# Altium PCB PCB.PcbDoc
Units mm, origin at the board's own origin, x right, y up, seen from the top; angles counter-clockwise.
Board outline 159.64 x 71.88 mm, 2 copper layers (Top Layer, Bottom Layer); 31 components, 22 nets, 102 pads, 39 vias.
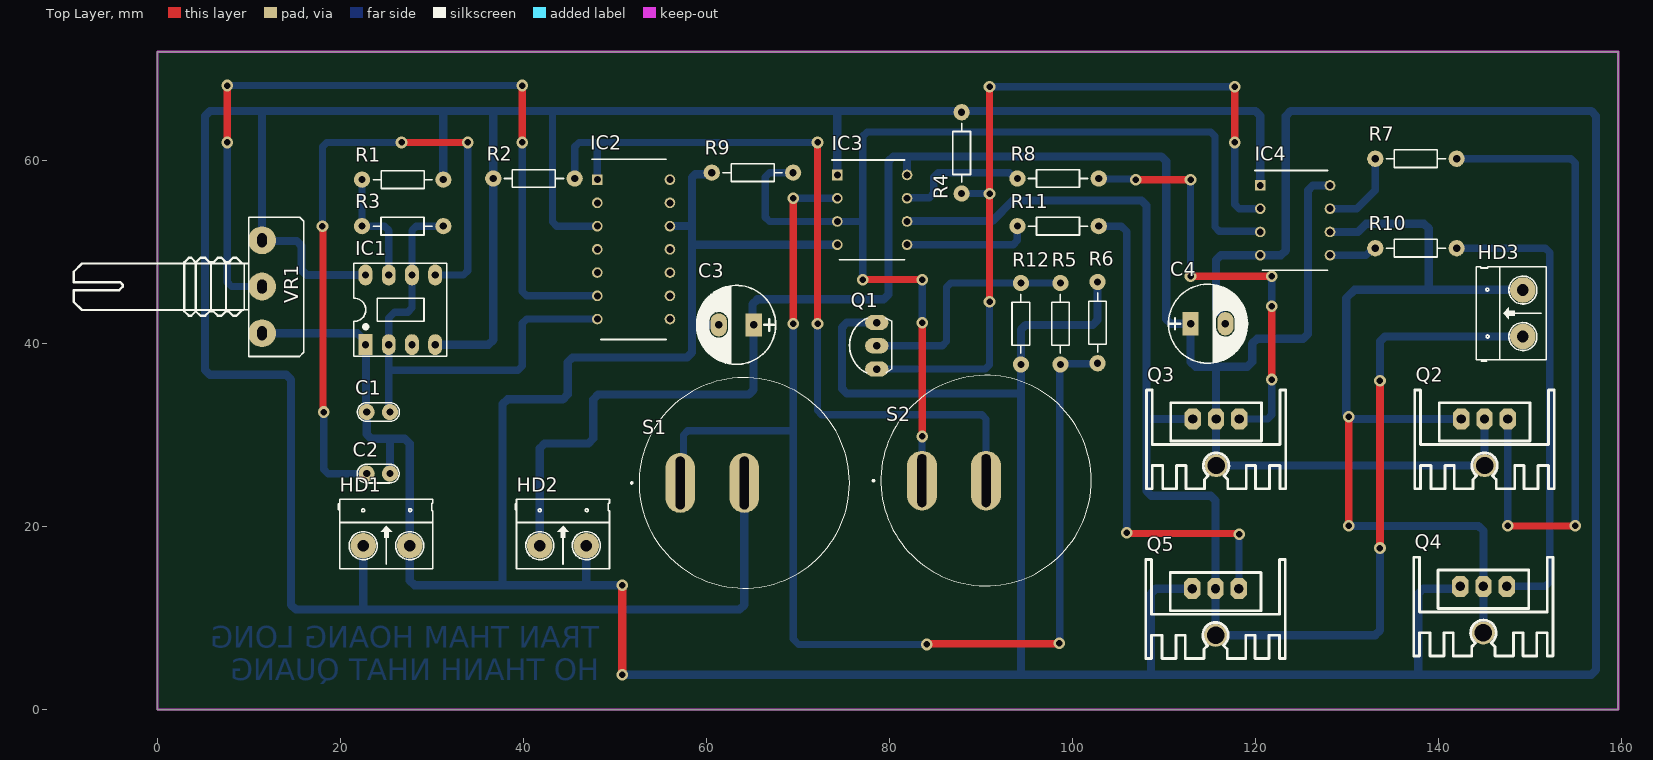
[diagram p0: Top Layer view]
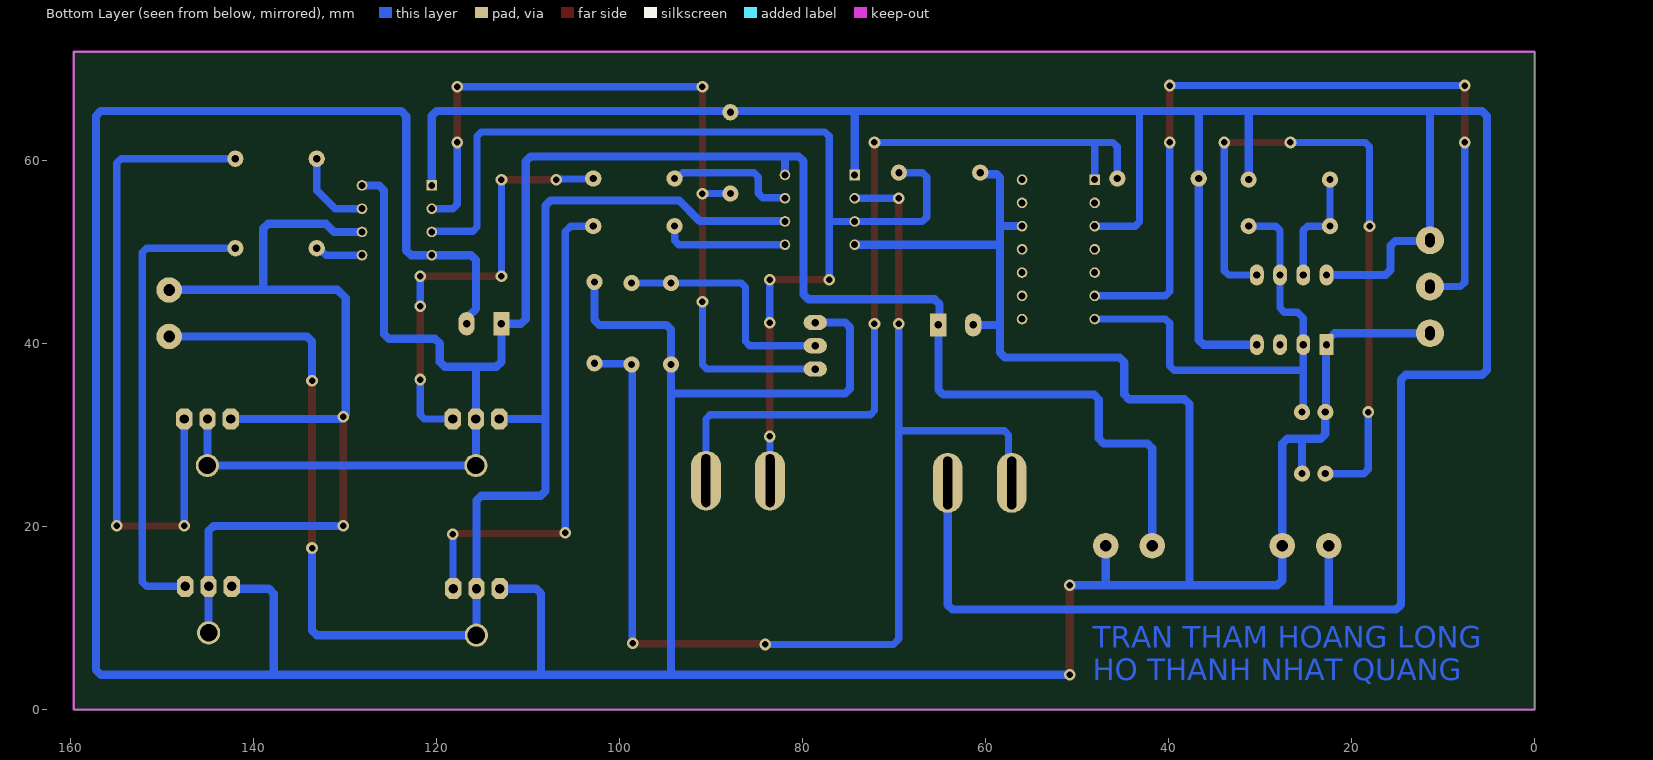
[diagram p1: Bottom Layer view, seen from below]
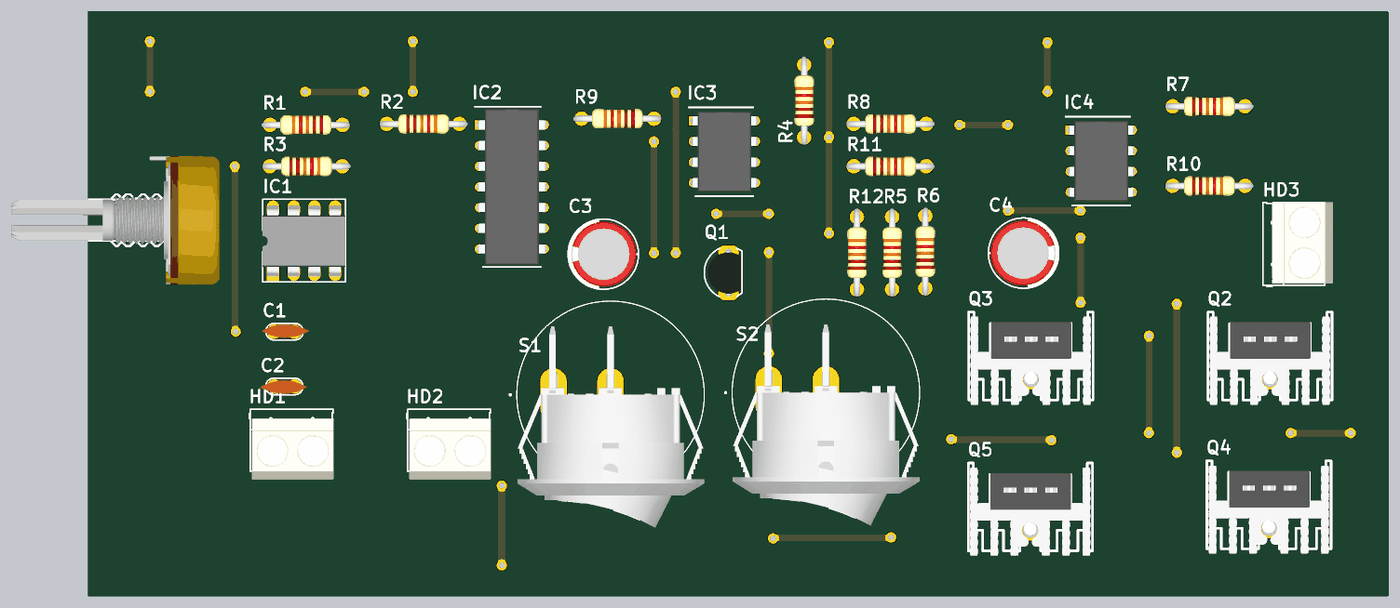
[diagram p2: 3D render of the assembled board from above, using the file's embedded part models]

## Layer stack, top to bottom
Top Solder: solder mask 0.0102, Solder Resist, Dk 3.5
Top Layer: signal copper 0.0356
Dielectric 1: dielectric 0.32, FR-4, Dk 4.8
Bottom Layer: signal copper 0.0356
Bottom Solder: solder mask 0.0102, Solder Resist, Dk 3.5

## Board outline
0,0 0,71.882 159.639,71.882 159.639,0

## Design rules (kind name [scope] priority, off if disabled: settings)
Clearance [All] p1: gap=0.7 ignorepadtopadclearanceinfootprint=FALSE
PlaneConnect [All] p1: planeconnectstyle=Direct reliefexpansion=0.508 reliefentries=4 reliefconductorwidth=0.254 reliefairgap=0.254
PolygonConnect [All] p1: connectstyle=Relief reliefconductorwidth=0.5 reliefentries=4 polygonreliefangle="90 Angle" airgapwidth=0.254
RoutingVias [All] p1: holewidth=0.762 width=2.032 viastyle="Through Hole" minholewidth=0.762 minwidth=2.032 maxholewidth=0.762 maxwidth=2.032
ShortCircuit [All] p1: allowed=TRUE
SolderMaskExpansion [All] p1: expansion=0.102 istentingtop=FALSE
UnRoutedNet [All] p1: checkbadconnections=TRUE
Width other [InNetClass('other')] p1: maxlimit=1.1 minlimit=0.5 preferedwidth=0.8
Width vcc [InNetClass('VCC')] p2: maxlimit=1.3 minlimit=0.8 preferedwidth=0.9
27 further rules are at their usual default settings.

## Classes and differential pairs
component class Schematic: C1 C2 C3 C4 HD1 HD2 HD3 IC1 IC2 IC3 IC4 Q1 Q4 Q5 R1 R2 R3 R4 R5 R6 R7 R8 R9 R10 R11 R12 S1 S2 VR1

## Components (designator, comment, footprint, x,y, rotation, side; value= is the part's Value field where it differs from the comment)
C1 "100nF" CN1 22.86,32.512 r0 top value=100pF
C2 "10nF" CN1 25.4,25.781 r180 top value=100pF
C3 "100uF/35V" CP1.5/3.4 65.151,42.037 r180 top value=100uF/35V/50V
C4 "100uF/35V" CP1.5/3.4 112.903,42.164 r0 top value=100uF/35V/50V
HD1 "Header 15V" HED2 22.479,17.907 r0 top value="Header 2"
HD2 "Header 12V" HED2 41.783,17.907 r0 top value="Header 2"
HD3 "Header Motor" HED2 149.225,40.767 r90 top value="Header 2"
IC1 "LM555" DIP8/W0.3 22.733,39.878 r0 top
IC2 "LM339AN" DIP794W56P254L1918H533Q14N 52.037,50.292 r0 top
IC3 "IR2104PBF" DIP762W56P254L988H533Q8N 78.105,54.61 r0 top
IC4 "IR2104PBF" DIP762W56P254L988H533Q8N 124.333,53.467 r0 top
Q1 "VN2222LL-G" QTO-92A 78.613,39.751 r90 top
Q2 "IRF520" QTO-220H3 147.574,31.75 r180 top
Q3 "IRF520" QTO-220H3 118.237,31.75 r180 top
Q4 "IRF520" QTO-220H3 147.447,13.462 r180 top
Q5 "IRF520" QTO-220H3 118.176,13.208 r180 top
R1 "10k" R1/4W 22.352,57.912 r0 top value="R1/4W - 1K"
R2 "10k" R1/4W 45.593,58.039 r180 top value="R1/4W - 1K"
R3 "10k" R1/4W 31.242,52.832 r180 top value="R1/4W - 1K"
R4 "1k" R1/4W 87.884,65.278 r270 top value="R1/4W - 1K"
R5 "1k" R1/4W 98.679,46.609 r270 top value="R1/4W - 1K"
R6 "10k" R1/4W 102.743,46.736 r270 top value="R1/4W - 1K"
R7 "1k" R1/4W 141.986,60.198 r180 top value="R1/4W - 1K"
R8 "1k" R1/4W 102.87,58.039 r180 top value="R1/4W - 1K"
R9 "10k" R1/4W 60.579,58.674 r0 top value="R1/4W - 1K"
R10 "1k" R1/4W 141.986,50.419 r180 top value="R1/4W - 1K"
R11 "1k" R1/4W 102.87,52.832 r180 top value="R1/4W - 1K"
R12 "1k" R1/4W 94.361,46.609 r270 top value="R1/4W - 1K"
S1 "RR511D1121" E-SWITCH_RR511D1121 64.135,24.765 r0 top
S2 "RR511D1121" E-SWITCH_RR511D1121 90.551,25.019 r0 top
VR1 "10K" VOL_1 11.43,51.283 r270 top value="VR 10K"

## Footprints (in the part's own frame and the unit in brackets; to place one, negate y for a bottom-side part, rotate by r counter-clockwise, add the part's x,y. Pads: shape width x height; smd on the part's side, far side on the other; paste and mask are expansions set on the pad)
CN1 [mil]
  round 70 hole 31: 1(0,0) 2(100,0)
  silkscreen extent -40,-40 141,40, body extent -60,-30 170,37, height 265
CP1.5/3.4 [mil] "Tu hoa 220->470uF,16V, 470uF/16V,25V"
  rect 70x100 hole 32: 1(0,0)
  oval 70x100 hole 32: 2(150,0)
  silkscreen extent -95,-170 245,170, body extent -85,-157 230,157, height 446
DIP8/W0.3 [mil] "8 PIN, W 300mil, Pin to pin 100mil"
  rect 60x90 hole 31: 1(0,0)
  oval 60x90 hole 31: 2(100,0) 3(200,0) 4(300,0) 5(300,300) 6(200,300) 7(100,300) 8(0,300)
  silkscreen extent -50,-50 350,350, body extent -50,-40 350,336, height 201
DIP762W56P254L988H533Q8N [mm]
  rect 1.158x1.158 hole 0.758: 1(-3.81,3.81)
  round 1.158 hole 0.758: 2(-3.81,1.27) 3(-3.81,-1.27) 4(-3.81,-3.81) 5(3.81,-3.81) 6(3.81,-1.27) 7(3.81,1.27) 8(3.81,3.81)
  silkscreen extent -4.39,-5.46 3.55,5.46, body extent -3.95,-4.94 3.95,4.94, height 5.33
DIP794W56P254L1918H533Q14N [mm]
  rect 1.16x1.16 hole 0.76: 1(-3.97,7.62)
  round 1.16 hole 0.76: 2(-3.97,5.08) 3(-3.97,2.54) 4(-3.97,0) 5(-3.97,-2.54) 6(-3.97,-5.08) 7(-3.97,-7.62) 8(3.97,-7.62) 9(3.97,-5.08) 10(3.97,-2.54) 11(3.97,0) 12(3.97,2.54) 13(3.97,5.08) 14(3.97,7.62)
  silkscreen extent -4.55,-9.84 3.56,9.84, body extent -4.11,-9.59 4.11,9.59, height 5.33
E-SWITCH_RR511D1121 [mm]
  oval 3.26x6.52 hole 0.98 slot 5.78 at 90 deg: 1(-7,0) 2(0,0)
  silkscreen extent -12.4,-11.5 11.5,11.5, body extent -11.5,-16.33 11.5,8.4, height 11.5
HED2 [mil] "Header 2, 2 pin, hight 300mil, Pin to Pin 200, Colour Green"
  round 110 hole 50: 1(0,0) 2(200,0)
  silkscreen extent -106,-100 300,200, body extent -92,-140 302,155, height 394
QTO-92A [mil] "TO-92"
  oval 66x100 hole 32: 1(100,0) 2(0,0) 3(-100,0)
  silkscreen extent -117,-65 119,118, body extent -110,-61 108,100, height 245
QTO-220H3 [mil] "TO-220 1-2-3"
  oct 70x90 hole 40: 1(0,0) 2(100,0) 3(200,0)
  round 100 hole 75: 2(100,200)
  silkscreen extent -200,-125 400,300, body extent -190,-102 392,323, height 984
R1/4W [mil] "R 1/4W, 2 Pin, 350mil"
  round 70 hole 31: 1(0,0) 2(350,0)
  silkscreen extent 48,-38 302,38, body extent -40,-47 386,47, height 111
VOL_1 [mil]
  round 120 hole 40 slot 60 at 0 deg: 1(0,0) 2(199,0) 3(400,0)
  silkscreen extent -99,-810 500,179, body extent -110,-818 510,188, height 839

## Part data
C1 C2: library part CN1, "Cap np  1pF - 472pF"
C3 C4: library part CP3, "Cap 100uF/35V - 470uF/16V", Description 1="1000uF/6,3V - 470uF/16V - 330uF - 25V", Description 2="220uF/35V - 100uF/50V - 63V - 4,7uF/200V", Description 3="22uF => 33uF100V - 3,3uF => 4,7uF/250V", Description 4="2,2uF =>3,3uF/350 - 2,2uF/400V - 1uF/450V"
HD1 HD2 HD3: library part Hed2, "Header 2 (Green)"
IC1: "Timer"
IC2: "Integrated Circuit", Manufacturer_Name=onsemi, Mouser Part Number=512-LM339AN, Arrow Part Number=LM339AN, Arrow Price/Stock=https://www.arrow.com/en/products/lm339an/on-semiconductor, Datasheet Link=https://www.onsemi.com/pub/Collateral/LM339A-D.pdf, Height=5.33mm, Manufacturer_Part_Number=LM339AN, Mouser Price/Stock=https://www.mouser.co.uk/ProductDetail/ON-Semiconductor-Fairchild/LM339AN?qs=r%252BnRUBmG8vwgzPexLRnjyQ%3D%3D
IC3 IC4: "Integrated Circuit", Manufacturer_Name=Infineon, Mouser Part Number=942-IR2104PBF, Arrow Part Number=IR2104PBF, Arrow Price/Stock=https://www.arrow.com/en/products/ir2104pbf/infineon-technologies-ag?region=nac, Datasheet Link=https://www.infineon.com/cms/en/product/power/gate-driver-ics/?, Height=5.33mm, Manufacturer_Part_Number=IR2104PBF, Mouser Price/Stock=https://www.mouser.co.uk/ProductDetail/Infineon-Technologies/IR2104PBF?qs=2r01AXMCG3MRbRuDhWcpKw%3D%3D
Q1: "MOSFET (N-Channel)", Manufacturer_Name=Microchip, Mouser Part Number=689-VN2222LL-G, Arrow Part Number=VN2222LL-G, Arrow Price/Stock=https://www.arrow.com/en/products/vn2222ll-g/microchip-technology?region=europe, Datasheet Link=http://www.microchip.com/mymicrochip/filehandler.aspx?ddocname=en571446, Height=5.334mm, Manufacturer_Part_Number=VN2222LL-G, Mouser Price/Stock=https://www.mouser.co.uk/ProductDetail/Microchip-Technology/VN2222LL-G?qs=H6g4Fy%252BsDGemwmUTAFka1Q%3D%3D
Q2 Q3 Q4 Q5: "MOSFET (N-Channel)", Manufacturer_Name=STMicroelectronics, Mouser Part Number=511-IRF520, Datasheet Link=https://eu.mouser.com/datasheet/2/389/stmicroelectronics_cd00000698-1204495.pdf, Height=4.6mm, Manufacturer_Part_Number=IRF520, Mouser Price/Stock=https://www.mouser.co.uk/ProductDetail/STMicroelectronics/IRF520?qs=%2FcnINApUglMqLk371v6AuA%3D%3D
R1 R2 R3 R4 R5 R6 R7 R8 R9 R10 R11 R12: library part R1/4W, "Resistor 1/4W"
S1 S2: "Rocker Switch, RR5 Series, SPST,OFF-ON,Blk Rocker,I/O Legend, 20A, 125VAC, QC", Package=None, Availability="In Stock", Check_prices=https://www.snapeda.com/parts/RR511D1121/E-Switch/view-part/?ref=eda, MF=E-Switch, MP=RR511D1121, Price=None, Purchase-URL=https://pricing.snapeda.com/search/part/RR511D1121/?ref=eda, SnapEDA_Link=https://www.snapeda.com/parts/RR511D1121/E-Switch/view-part/?ref=snap
VR1: library part "Var Resitor", "Var Resistor"

## Via types
v1: diameter 1.27, hole 0.711, Top Layer to Bottom Layer, 39 vias

## Nets (pads, with @x,y where several pads share a name; then routed paths per layer and width w, separated by ;. In a path a pad name is that pad's centre, name@x,y a point inside that pad or via, vN(x,y) a via of type N, cw(c..) or ccw(c..) an arc to the next point about the centre after c; other vN are vias at no path point)
+12V: C3.1 C4.1 HD2.1 IC3.8 IC4.8 Q2.2 Q3.2 | length 214.8
  Bottom Layer w0.9: HD2.1 41.783,28.556 42.31,29.083 47.098,29.083 47.625,29.61 47.625,33.89 48.152,34.417 64.624,34.417 65.151,34.944 C3.1 65.024,42.164 65.024,44.304 65.551,44.831 79.356,44.831 79.883,45.358 79.883,59.925 80.41,60.452 81.915,60.452 ; IC3.8 81.915,60.452 ; IC4.8 126.257,57.277 125.73,56.75 125.73,41.04 125.203,40.513 120.161,40.513 119.634,39.986 119.634,37.992 119.107,37.465 115.697,37.465 ; Q2.2@145.034,31.75 145.034,26.67 115.697,26.67 115.697,31.75 115.697,37.465 ; 81.915,60.452 109.709,60.452 110.236,59.925 110.236,42.691 110.763,42.164 C4.1 112.903,37.992 113.43,37.465 115.697,37.465
+15V: HD1.1 IC1.4 IC1.8 IC2.3 IC3.1 IC4.1 R1.2 R2.2 R4.1 S1.2 VR1.1 | length 347.8
  Bottom Layer w0.8: 43.18,65.405 43.18,53.301 43.649,52.832 IC2.3
  Bottom Layer w0.9: HD1.1 22.479,10.922 ; IC1.8 16.275,47.498 15.748,48.025 15.748,50.682 15.221,51.209 11.504,51.209 VR1.1 11.43,65.278 11.557,65.405 ; IC1.4 36.176,39.878 36.703,40.405 R2.2 36.703,65.405 ; R1.2 31.242,65.405 ; S1.2 64.135,11.449 63.608,10.922 22.479,10.922 ; IC3.1 74.295,65.405 ; IC4.1 120.523,64.878 119.996,65.405 88.011,65.405 R4.1 87.757,65.405 74.295,65.405 ; 11.557,65.405 5.734,65.405 5.207,64.878 5.207,37.103 5.734,36.576 14.078,36.576 14.605,36.049 14.605,11.449 15.132,10.922 22.479,10.922 ; 11.557,65.405 31.242,65.405 ; 31.242,65.405 36.703,65.405 ; 36.703,65.405 43.18,65.405 74.295,65.405
GND: C1.1 C2.1 C3.2 C4.2 HD1.2 HD2.2 IC1.1 IC2.12 IC3.4 IC4.4 Q1.1 Q4.3 Q5.3 R6.1 R9.1 R12.2 VR1.3 | length 511.1
  Top Layer w0.9: v1(50.8,3.81) v1(50.8,13.589)
  Bottom Layer w0.9: VR1.3 21.869,41.123 22.733,40.259 IC1.1 22.796,39.814 22.796,32.575 C1.1 22.86,30.118 23.387,29.591 25.4,29.591 ; C2.1 25.4,29.591 ; HD2.2 46.863,13.589 ; v1(50.8,3.81) 94.361,3.81 ; v1(50.8,13.589) 46.863,13.589 ; IC2.12 58.42,52.832 ; R9.1 60.411,58.506 58.779,58.506 58.42,58.147 58.42,52.832 ; C3.2 58.42,42.037 ; IC3.4 58.42,50.8 ; Q1.1 75.33,42.291 74.803,41.764 74.803,35.071 75.33,34.544 94.361,34.544 ; R6.1 102.743,42.564 102.216,42.037 94.888,42.037 94.361,41.51 R12.2 94.361,34.544 ; Q5.3 109.112,13.208 108.585,12.681 108.585,3.81 ; C4.2 116.713,42.783 115.697,43.799 115.697,49.13 116.224,49.657 IC4.4 122.79,49.657 123.317,50.184 123.317,64.878 123.844,65.405 156.699,65.405 157.226,64.878 157.226,4.337 156.699,3.81 137.795,3.81 ; Q4.3 142.113,13.208 138.322,13.208 137.795,12.681 137.795,3.81 ; 25.4,29.591 27.032,29.591 27.559,29.064 HD1.2 27.559,14.116 28.086,13.589 37.719,13.589 ; 37.719,13.589 37.719,33.382 38.246,33.909 44.304,33.909 44.831,34.436 44.831,37.954 45.358,38.481 57.893,38.481 58.42,39.008 58.42,42.037 ; 37.719,13.589 46.863,13.589 ; 58.42,42.037 58.42,50.8 ; 58.42,50.8 58.42,52.832 ; 94.361,3.81 94.361,34.544 ; 94.361,3.81 108.585,3.81 ; 108.585,3.81 137.795,3.81
NetC1_2: C1.2 IC1.2 IC1.6 IC2.7 R3.1 | length 53.4
  Bottom Layer w0.8: C1.2 25.273,32.639 25.273,37.338 ; R3.1 28.282,52.832 27.813,52.363 IC1.6 27.813,43.903 27.344,43.434 25.908,43.434 25.273,42.799 IC1.2 25.273,37.338 ; IC2.7 40.347,42.672 39.878,42.203 39.878,37.553 39.409,37.084 25.527,37.084 25.4,37.211 25.273,37.338
NetC2_2: C2.2 IC1.5 | length 74
  Top Layer w0.8: v1(18.034,52.832) 18.098,52.768 18.098,32.575 v1(18.161,32.512) ; v1(26.67,61.976) v1(33.909,61.976)
  Bottom Layer w0.8: v1(18.034,52.832) 18.034,61.507 18.503,61.976 v1(26.67,61.976) ; v1(18.161,32.512) 18.161,26.25 18.63,25.781 C2.2 ; IC1.5 33.44,47.498 33.909,47.967 v1(33.909,61.976)
NetHD3_1: HD3.1 IC3.6 Q3.3 Q5.2 | length 151.9
  Top Layer w0.9: v1(133.604,17.653) v1(133.604,35.941)
  Bottom Layer w0.9: IC3.6 81.964,53.389 91.235,53.389 93.472,55.626 107.55,55.626 108.077,55.099 108.077,31.75 ; Q3.3 108.077,31.75 ; v1(133.604,17.653) 133.604,8.655 133.077,8.128 115.636,8.128 115.636,13.208 115.636,22.841 115.109,23.368 108.604,23.368 108.077,23.895 108.077,31.75 ; v1(133.604,35.941) 133.604,40.24 134.131,40.767 HD3.1
NetHD3_2: HD3.2 IC4.6 Q2.3 Q4.2 | length 101.3
  Top Layer w0.254: v1@130.18,32.009 v1(130.185,32.014)
  Top Layer w0.8: v1(130.175,20.066) 130.18,20.071 v1@130.18,32.009
  Bottom Layer w0.9: IC4.6 131.191,52.197 132.08,53.086 138.411,53.086 138.938,52.559 138.938,45.871 ; v1(130.175,20.066) 144.38,20.066 144.907,19.539 144.907,13.462 Q4.2@144.907,8.382 ; Q2.3 130.448,31.75 129.921,32.277 129.921,44.958 130.834,45.871 138.938,45.871 ; HD3.2@149.201,45.871 138.938,45.871
NetIC1_7: IC1.7 R1.1 R3.2 | length 13.1
  Bottom Layer w0.8: R1.1 R3.2 24.804,52.832 25.273,52.363 IC1.7
NetIC2_1: IC2.1 R2.1 S2.2 | length 89.1
  Top Layer w0.8: v1(72.136,42.164) v1(72.136,61.976)
  Bottom Layer w0.8: R2.1 45.593,61.507 46.062,61.976 48.067,61.976 ; IC2.1 48.067,61.976 ; v1(72.136,42.164) 72.136,32.684 72.605,32.215 90.082,32.215 90.551,31.746 S2.2 ; v1(72.136,61.976) 48.067,61.976
NetIC2_6: IC2.6 VR1.2 | length 88.7
  Top Layer w0.8: v1(7.62,61.976) v1(7.62,68.199) ; v1(39.878,61.976) v1(39.878,68.199)
  Bottom Layer w0.8: v1(7.62,61.976) 7.62,46.697 8.089,46.228 VR1.2 ; v1(7.62,68.199) v1(39.878,68.199) ; v1(39.878,61.976) 39.878,45.681 40.347,45.212 IC2.6
NetIC3_2: IC3.2 R5.2 R6.2 S1.1 | length 134.6
  Top Layer w0.8: v1(69.469,42.164) v1(69.469,55.88) ; v1(84.074,7.112) 84.138,7.175 98.489,7.175 v1(98.552,7.239)
  Bottom Layer w0.8: S1.1 57.488,25.118 57.488,30.011 57.957,30.48 69.469,30.48 ; v1(69.469,42.164) 69.469,30.48 ; v1(69.469,55.88) IC3.2 ; v1(84.074,7.112) 70.065,7.112 69.469,7.708 69.469,30.48 ; v1(98.552,7.239) 98.615,7.302 98.615,37.655 R5.2 98.742,37.782 102.679,37.782 R6.2
NetIC3_3: IC3.3 IC4.3 R9.2 S2.1 | length 116.6
  Top Layer w0.8: v1(77.089,46.99) v1(83.566,46.99) ; v1(83.566,29.845) v1(83.566,42.291)
  Bottom Layer w0.8: R9.2 66.89,58.674 66.421,58.205 66.421,53.809 66.89,53.34 IC3.3 77.089,53.34 ; v1(77.089,46.99) 77.089,53.34 ; S2.1 83.559,25.026 83.559,29.838 v1(83.566,29.845) ; v1(83.566,42.291) v1(83.566,46.99) ; IC4.3 120.455,52.265 116.039,52.265 115.57,52.734 115.57,62.65 115.101,63.119 77.558,63.119 77.089,62.65 77.089,53.34
NetIC3_5: IC3.5 R11.2 | length 13.8
  Bottom Layer w0.8: IC3.5 93.511,50.8 93.98,51.269 R11.2
NetIC3_7: IC3.7 R8.2 | length 14.5
  Bottom Layer w0.8: IC3.7 81.983,55.948 84.367,55.948 84.836,56.417 84.836,58.205 85.305,58.674 93.08,58.674 93.715,58.039 R8.2
NetIC4_2: IC4.2 Q1.3 R4.2 | length 88.6
  Top Layer w0.8: v1(90.932,44.577) v1(90.932,56.388) v1(90.932,68.072) ; v1(117.729,61.976) v1(117.729,68.072)
  Bottom Layer w0.254: R4.2 R4.2@88.037,56.388
  Bottom Layer w0.8: Q1.3 90.463,37.211 90.932,37.68 v1(90.932,44.577) ; R4.2@88.037,56.388 v1(90.932,56.388) ; v1(90.932,68.072) v1(117.729,68.072) ; v1(117.729,61.976) 117.729,55.206 118.198,54.737 IC4.2
NetIC4_5: IC4.5 R10.2 | length 5.3
  Bottom Layer w0.8: IC4.5 132.069,49.657 132.831,50.419 R10.2
NetIC4_7: IC4.7 R7.2 | length 9.2
  Bottom Layer w0.8: IC4.7 131.064,54.737 133.096,56.769 R7.2
NetQ1_2: Q1.2 R5.1 R12.1 | length 26.4
  Bottom Layer w0.8: Q1.2 85.764,39.751 86.233,40.22 86.233,46.14 86.702,46.609 R12.1 R5.1
NetQ2_1: Q2.1 R7.1 | length 71.9
  Top Layer w0.8: v1(147.574,20.066) v1(154.94,20.066)
  Bottom Layer w0.8: R7.1 154.471,60.198 154.94,59.729 v1(154.94,20.066) ; v1(147.574,20.066) Q2.1
NetQ3_1: Q3.1 R8.1 | length 48.4
  Top Layer w0.8: v1(106.934,57.912) v1(112.903,57.912) ; v1(112.903,47.371) v1(121.793,47.371) ; v1(121.793,36.068) v1(121.793,44.069)
  Bottom Layer w0.8: R8.1 102.933,57.975 106.87,57.975 v1(106.934,57.912) ; v1(112.903,47.371) v1(112.903,57.912) ; Q3.1 121.324,31.75 121.793,32.219 v1(121.793,36.068) ; v1(121.793,44.069) v1(121.793,47.371)
NetQ4_1: Q4.1 R10.1 | length 51.3
  Bottom Layer w0.8: R10.1 151.677,50.419 152.146,49.95 152.146,13.931 151.677,13.462 Q4.1
NetQ5_1: Q5.1 R11.1 | length 54.6
  Top Layer w0.8: v1(105.918,19.304) 105.981,19.241 118.173,19.241 v1(118.237,19.177)
  Bottom Layer w0.8: R11.1 105.322,52.832 105.918,52.236 v1(105.918,19.304) ; Q5.1 118.207,13.238 118.207,19.147 v1(118.237,19.177)
pads on no net: IC1.3 IC2.2 IC2.4 IC2.5 IC2.8 IC2.9 IC2.10 IC2.11 IC2.13 IC2.14

## Keep-outs
Keep-Out Layer:
  the board outline again, w0.254

## Other copper
Bottom Layer:
  text "TRAN THAM HOANG LONG" at 48.256,5.964 h4
  text "HO THANH NHAT QUANG" at 48.256,2.447 h4

## Dimensions
159.639,0 to 159.639,71.882 on Top Overlay
0,0 to 159.639,0 on Top Overlay